# EAGLE board NullFanSpeedSensor (EAGLE 9.5.2)
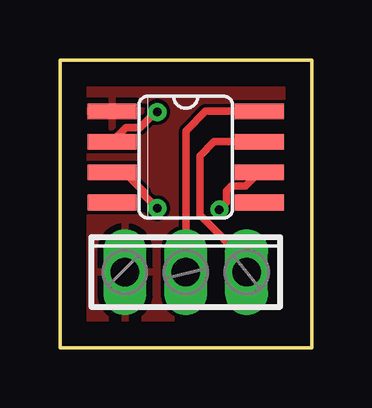
[diagram p0: board, top side]
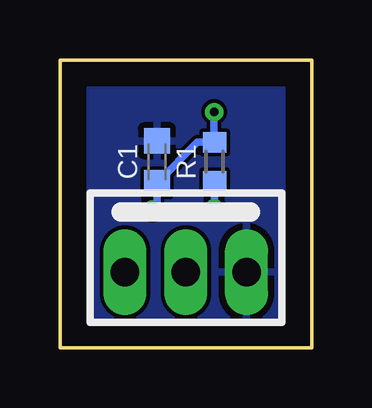
[diagram p1: board, bottom side, seen from below]

Size 10.5 x 12 mm. Coordinates in mm from the lower left corner, seen from the top.
Outline: 0,0 10.5,0 10.5,12 0,12 0,0
Copper layers (1*16): Top 0.035mm / dielectric 1.5mm / Bottom 0.035mm
Design rules "default *": minimum track width 6mil, minimum drill 0.35mm, track to track 6mil, track to pad 6mil, pad to pad 6mil, via to via 6mil, smd to smd 6mil, copper to edge 40mil, drill to drill 6mil, minimum pad ring 10mil, minimum via ring 8mil, stop-mask expansion 4mil, vias tented up to drill 14mil, thermal gap 10mil

## Footprints (pad centres in the part's own frame; a part is rotated, then mirrored left to right if it is on the bottom)
C0603K = smd 1.05 x 1.08: 1 -0.875,0; 2 0.875,0
3POL254 = drill 1.2 long: 1 -2.54,0; 2 0,0; 3 2.54,0
SO08 = smd 0.66 x 2.032: 1 -1.905,-3.073; 2 -0.635,-3.073; 3 0.635,-3.073; 4 1.905,-3.073; 5 1.905,3.073; 6 0.635,3.073; 7 -0.635,3.073; 8 -1.905,3.073
R0603 = smd 0.87 x 0.98: 1 -0.815,0; 2 0.815,0

## Placement (x,y rotation side)
C1  1uF  [C0603K]  6.45,7.75 270 bottom
CON  [3POL254]  5.25,3.15 0 top
IC1  [SO08]  5.25,7.95 270 top
R1  [R0603]  4.05,7.75 90 bottom

## Library data of the parts
C1 = ref-packages
CON = con-phoenix-254
IC1 = 40xx
R1 = smd-ipc

## Nets
GND: C1.1 CON.1 IC1.1
OUT: CON.3 IC1.7
Q: IC1.3 R1.1
TR: C1.2 IC1.2 IC1.6 R1.2
VCC: CON.2 IC1.8

## Tracks (layer width: path | path; a pad name or v marks a point on that pad's centre or on a via)
GND
  pour Top: 0,0 10.5,0 10.5,12 0,12
  pour Bottom: 0,0 10.5,0 10.5,12 0,12
OUT
  Top 0.305: IC1.7 6.43,8.59 5.84,8 5.84,5.53 7.79,3.58 CON.3
Q  (via drill 0.35)
  Top 0.305: v4.06,5.81 3.5,6.38 3.5,6.5 2.68,7.32 IC1.3
  Bottom 0.305: v4.06,5.81 4.05,5.83 R1.1
TR  (via drill 0.35)
  Top 0.305: IC1.6 7.74,6.73 7.16,6.73 6.95,6.52 6.95,6.06 v6.65,5.76 | v4.06,9.83 4,9.83 3.34,9.17 2.76,9.17 IC1.2
  Bottom 0.305: v6.65,5.76 6.45,5.96 C1.2 4.76,8.56 R1.2 | v4.06,9.83 4.06,8.58
  Bottom 0.406: 4.06,8.58 R1.2
VCC
  Top 0.305: IC1.8 6.07,9.86 5.25,9.03 CON.2